# Altium PCB houzhuan1.PcbDoc
Units mm, origin at the board's own origin, x right, y up, seen from the top; angles counter-clockwise.
Board outline 469.9 x 419.1 mm, 2 copper layers (Top Layer, Bottom Layer); 22 components, 0 nets, 52 pads, 0 vias.
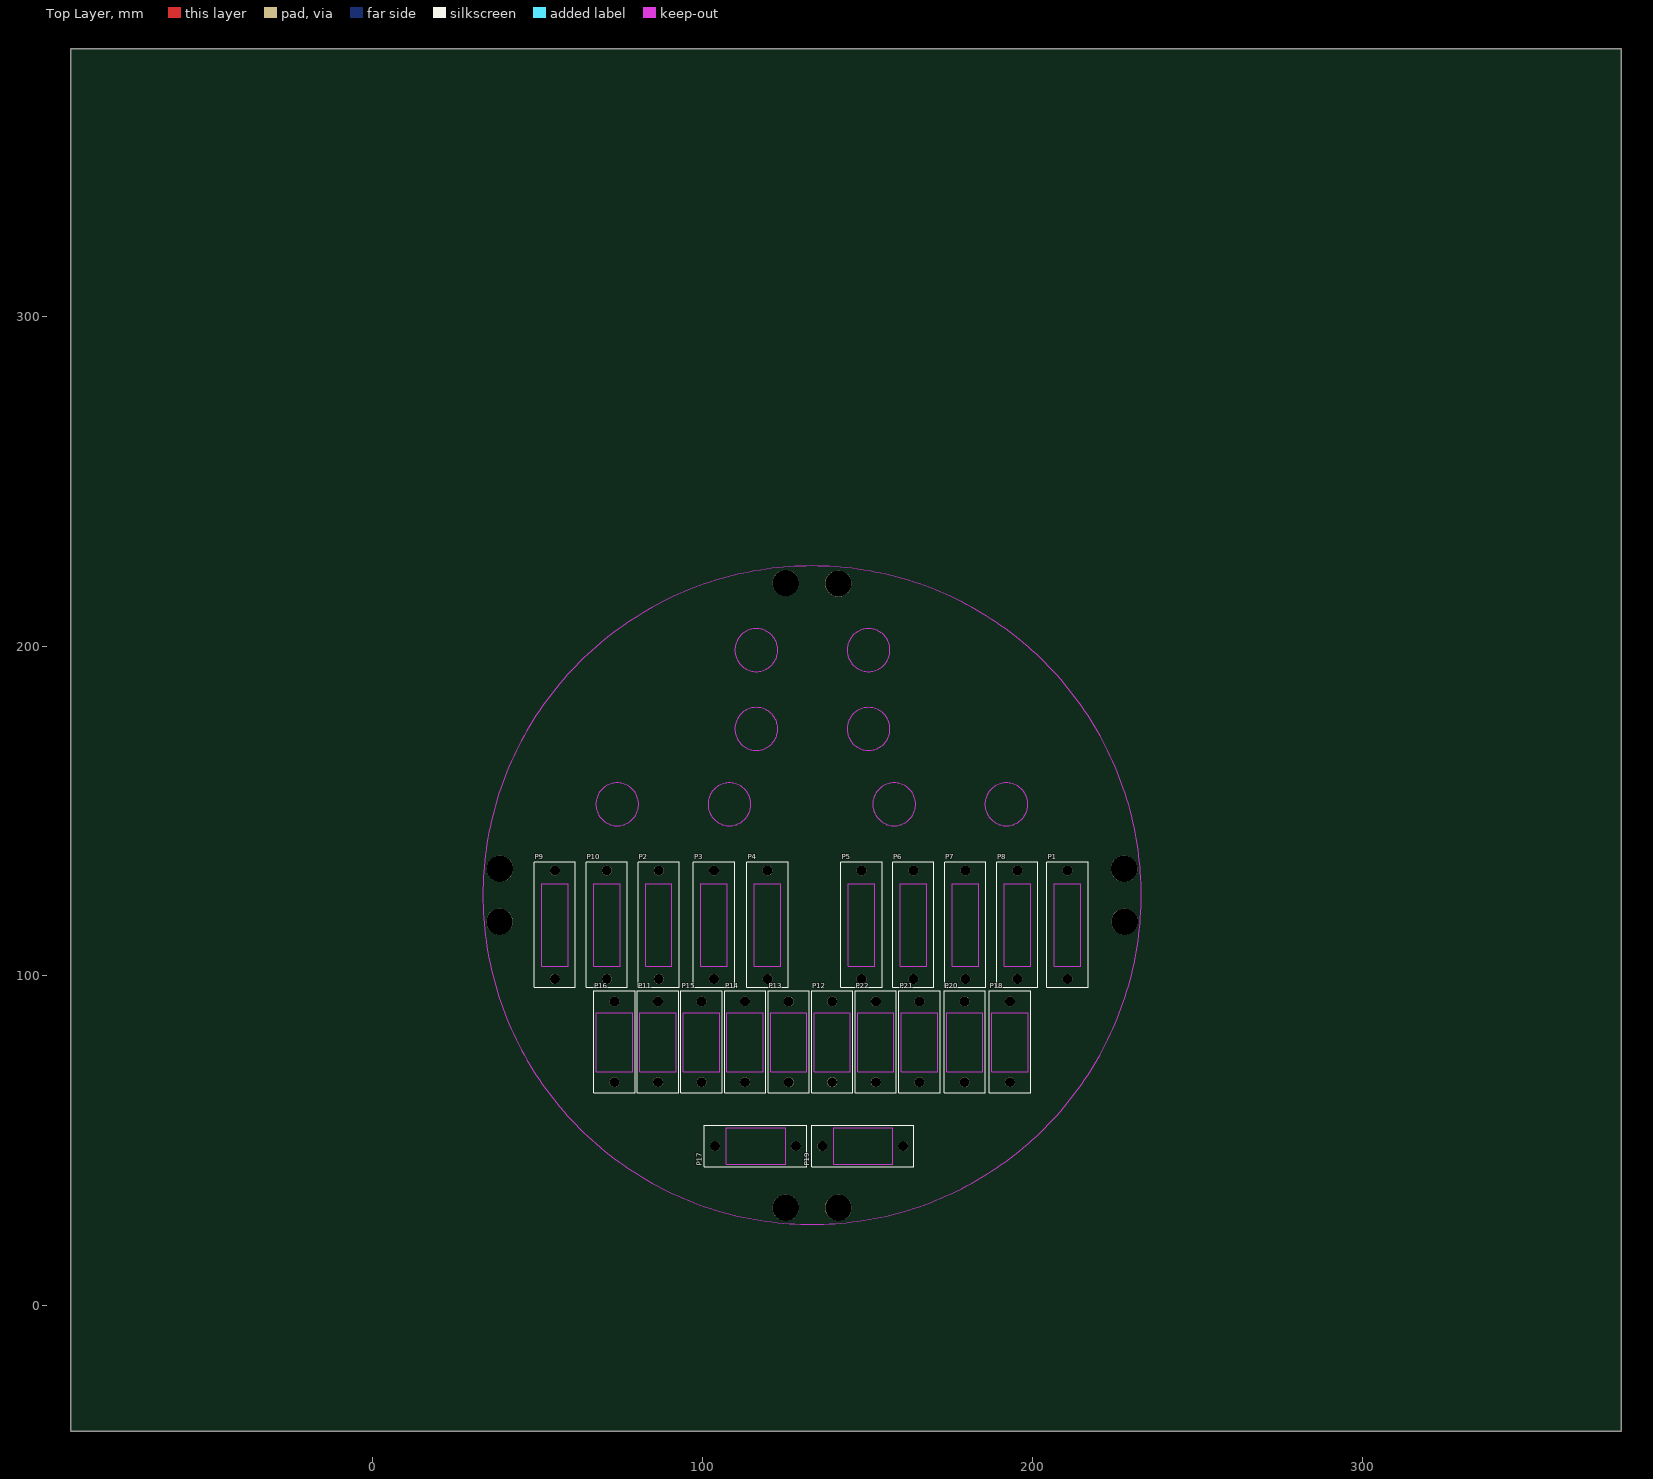
[diagram p0: Top Layer view]
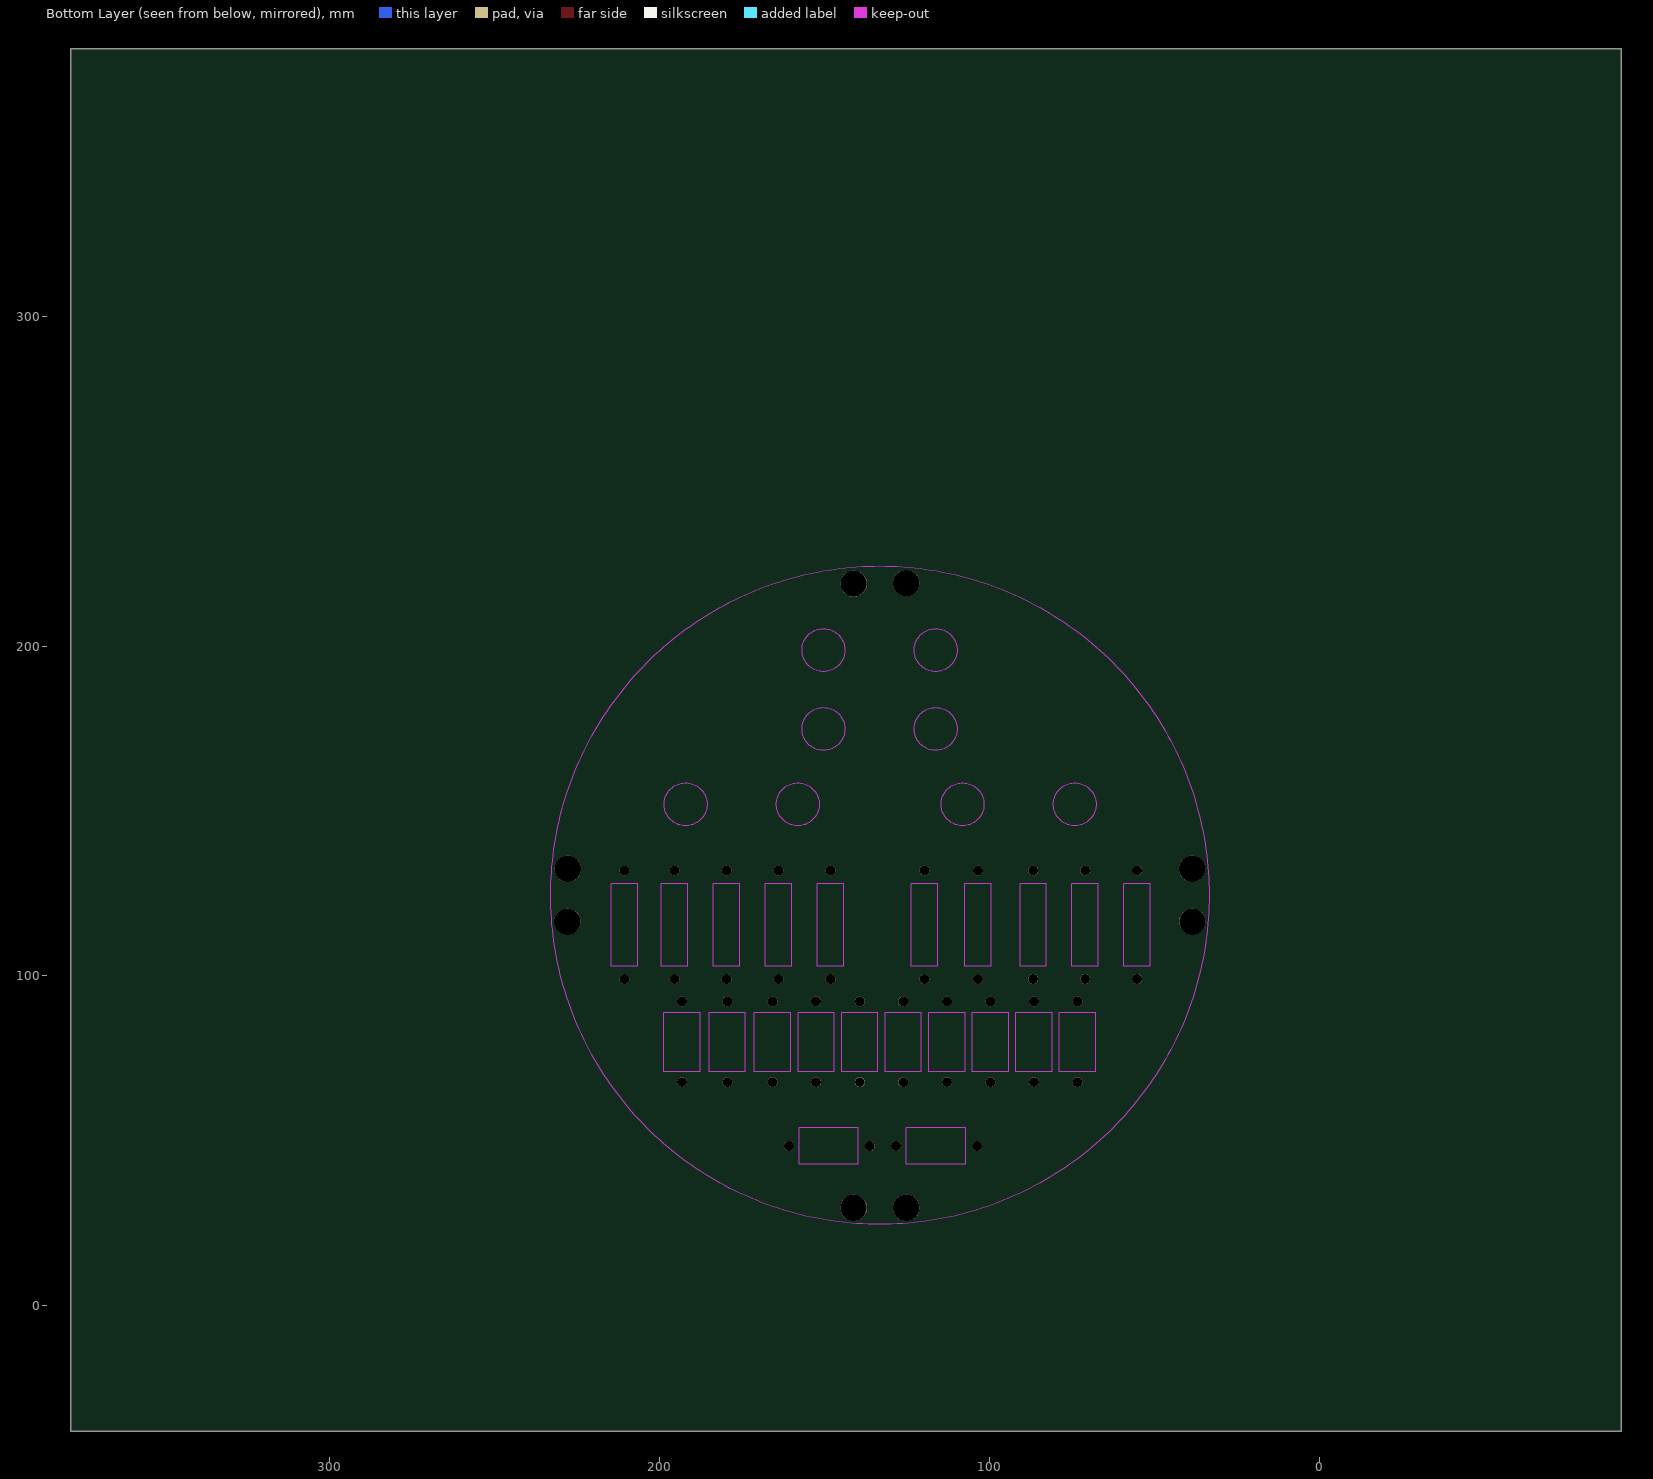
[diagram p1: Bottom Layer view, seen from below]

## Layer stack, top to bottom
Top Layer: signal copper 0.0356
Dielectric: dielectric 0.32, FR-4, Dk 4.8
Bottom Layer: signal copper 0.0356

## Board outline
-91.44,-38.1 378.46,-38.1 378.46,381 -91.44,381

## Design rules (kind name [scope] priority, off if disabled: settings)
Clearance [All] p1: gap=0.254
PolygonConnect [All] p1: connectstyle=Relief reliefconductorwidth=0.254 reliefentries=4 polygonreliefangle="90 Angle"
RoutingVias [All] p1: holewidth=0.711 width=1.27 viastyle="Through Hole" minholewidth=0.711 minwidth=1.27 maxholewidth=0.711 maxwidth=1.27
SilkscreenOverComponentPads [All] p1: minsilkscreentomaskgap=0.254
SolderMaskExpansion [All] p1: expansion=0.102
Width [All] p1: maxlimit=0.254 minlimit=0.254 preferedwidth=0.254
27 further rules are at their usual default settings.

## Components (designator, comment, footprint, x,y, rotation, side; value= is the part's Value field where it differs from the comment)
P1 "3P" 3P 216.916,96.52 r90 top
P2 "3P" 3P 92.964,96.52 r90 top
P3 "3P" 3P 109.728,96.52 r90 top
P4 "3P" 3P 125.984,96.52 r90 top
P5 "3P" 3P 154.432,96.52 r90 top
P6 "3P" 3P 170.18,96.52 r90 top
P7 "3P" 3P 185.928,96.52 r90 top
P8 "3P" 3P 201.676,96.52 r90 top
P9 "3P" 3P 61.468,96.52 r90 top
P10 "3P" 3P 77.216,96.52 r90 top
P11 "2P" 2P 80.264,64.516 r90 top
P12 "2P" 2P 133.096,64.516 r90 top
P13 "2P" 2P 119.888,64.516 r90 top
P14 "2P" 2P 106.68,64.516 r90 top
P15 "2P" 2P 93.472,64.516 r90 top
P16 "2P" 2P 67.056,64.516 r90 top
P17 "2P" 2P 131.572,42.164 r180 top
P18 "2P" 2P 186.944,64.516 r90 top
P19 "2P" 2P 164.084,42.164 r180 top
P20 "2P" 2P 173.228,64.516 r90 top
P21 "2P" 2P 159.512,64.516 r90 top
P22 "2P" 2P 146.304,64.516 r90 top

## Footprints (in the part's own frame and the unit in brackets; to place one, negate y for a bottom-side part, rotate by r counter-clockwise, add the part's x,y. Pads: shape width x height; smd on the part's side, far side on the other; paste and mask are expansions set on the pad)
2P [mm]
  round 3 hole 3: 4(3.25,-6.25) 5(27.75,-6.25)
  Keep-Out Layer lines w0.051: 6.401,-0.75 24.333,-0.75 24.333,-11.75 6.401,-11.75 6.401,-0.75
  silkscreen extent 0,-12.5 31,0
3P [mm]
  round 3 hole 3: 8(2.54,6.223) 9(35.408,6.223)
  Keep-Out Layer lines w0.051: 6.452,10.211 31.445,10.211 31.445,2.21 6.452,2.21 6.452,10.211
  silkscreen extent 0,0 38.01,12.5

## Free pads (board coordinates)
  round 8 hole 8: 0(227.965,116.459) 1(38.481,116.459) 2(125.222,219.075) 3(141.224,218.948) 4(141.224,29.718) 5(125.222,29.718) 6(38.608,132.461) 7(227.838,132.461)

## Nets (pads, with @x,y where several pads share a name; then routed paths per layer and width w, separated by ;. In a path a pad name is that pad's centre, name@x,y a point inside that pad or via, vN(x,y) a via of type N, cw(c..) or ccw(c..) an arc to the next point about the centre after c; other vN are vias at no path point)
pads on no net: P1.8 P1.9 P2.8 P2.9 P3.8 P3.9 P4.8 P4.9 P5.8 P5.9 P6.8 P6.9 P7.8 P7.9 P8.8 P8.9 P9.8 P9.9 P10.8 P10.9 P11.4 P11.5 P12.4 P12.5 P13.4 P13.5 P14.4 P14.5 P15.4 P15.5 P16.4 P16.5 P17.4 P17.5 P18.4 P18.5 P19.4 P19.5 P20.4 P20.5 P21.4 P21.5 P22.4 P22.5

## Keep-outs
Keep-Out Layer:
  circle w0.254: c116.332,174.879 r6.5
  circle w0.254: c150.345,174.879 r6.5
  circle w0.254: c150.345,198.755 r6.5
  circle w0.254: c116.332,198.755 r6.5
  circle w0.254: c133.22,124.46 r99.8
  circle w0.254: c108.181,152.019 r6.5
  circle w0.254: c74.168,152.019 r6.5
  circle w0.254: c192.128,152.019 r6.5
  circle w0.254: c158.115,152.019 r6.5